# EAGLE board Gleissperr (EAGLE 9.5.2)
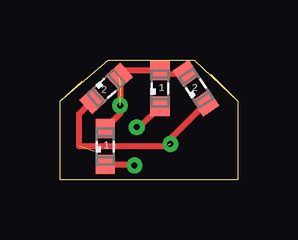
[diagram p0: board, top side]
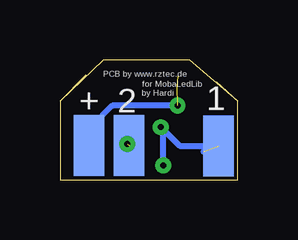
[diagram p1: board, bottom side, seen from below]

Size 7.4 x 5 mm. Coordinates in mm from the lower left corner, seen from the top.
Outline: 7.4,3.3 6.3,4.4
Outline: 0.9,4.1 0,3.3
Outline: 0,3.3 0,0 7.4,0 7.4,3.3
Outline: 0,3.3 2,5 5.6,5 7.4,3.3
Copper layers (1*16): Top 0.035mm / dielectric 1.5mm / Bottom 0.035mm
Design rules "default": minimum track width 10mil, minimum drill 24mil, track to track 8mil, track to pad 8mil, pad to pad 8mil, via to via 8mil, smd to smd 8mil, copper to edge 40mil, drill to drill 8mil, minimum pad ring 10mil, minimum via ring 8mil, stop-mask expansion 4mil, vias tented up to drill 0mil, thermal gap 10mil

## Footprints (pad centres in the part's own frame; a part is rotated, then mirrored left to right if it is on the bottom)
LED_SML0603 = smd 0.8 x 0.8: A 0.75,0; C -0.75,0
SMD1,27-2,54 = smd 1.27 x 2.54: 1 0,0

## Placement (x,y rotation side)
1  [LED_SML0603]  1.88,1.39 90 top
2  [LED_SML0603]  4.17,3.82 90 top
3  [LED_SML0603]  1.92,3.82 42.3 top
4  [LED_SML0603]  5.67,3.83 123.7 top
PAD1  [SMD1,27-2,54]  0.79,1.42 0 bottom
PAD7  [SMD1,27-2,54]  4.52,1.43 180 bottom
PAD+  [SMD1,27-2,54]  6.19,1.43 180 bottom

## Library data of the parts
1-4 = eagle-ltspice; SPICEMODEL: NONE; SPICEPREFIX: D; SPICETYPE: diode
PAD1 PAD7 PAD+ = wirepad

## Nets
N$1: 1.C 2.C PAD1.1
N$3: 3.C 4.C PAD7.1
N$+: 1.A 2.A 3.A 4.A PAD+.1

## Tracks (layer width: path | path; a pad name or v marks a point on that pad's centre or on a via)
N$1  (via drill 0.25)  (1 unrouted)
  Top 0.254: 1.88,0.82 1.C 3.06,0.64 v3.1,0.6 | 2.C 3.3,2.2 v3.2,2.2
  Bottom 0.254: 1.42,1.18 1.18,1.42 2.42,1.42 v3.2,2.2 3.1,2.1 v3.1,0.6
N$3  (via drill 0.25)  (1 unrouted)
  Top 0.254: 4.C 4.6,1.7 v4.6,1.5 4.5,1.4 0.8,1.4 0.8,2.75 3.C
N$+  (via drill 0.25 pad 0.55)  (2 unrouted)
  Top 0.254: 3.A 2.72,4.57 2.A 4.1,4.57 4.3,4.37 4.A | 1.A 2.52,2.79 2.52,3.92
  Bottom 0.254: PAD+.1 6.08,1.53 6.08,2.24 5.22,3.1 v2.5,3.1

## Text on the board
tNames: 4 | 1 | 2 | 1
bNames: for MobaLedLib / by Hardi | PCB by www.rztec.de | 1 | 2 | +